# Altium PCB SolderingStation_v2.7_2026-06-25.pcbdoc
Units mil, origin at the board's own origin, x right, y up, seen from the top; angles counter-clockwise.
Board outline 3327.5 x 2330 mil, 2 copper layers (Top Layer, Bottom Layer); 49 components, 35 nets, 147 pads, 83 vias.
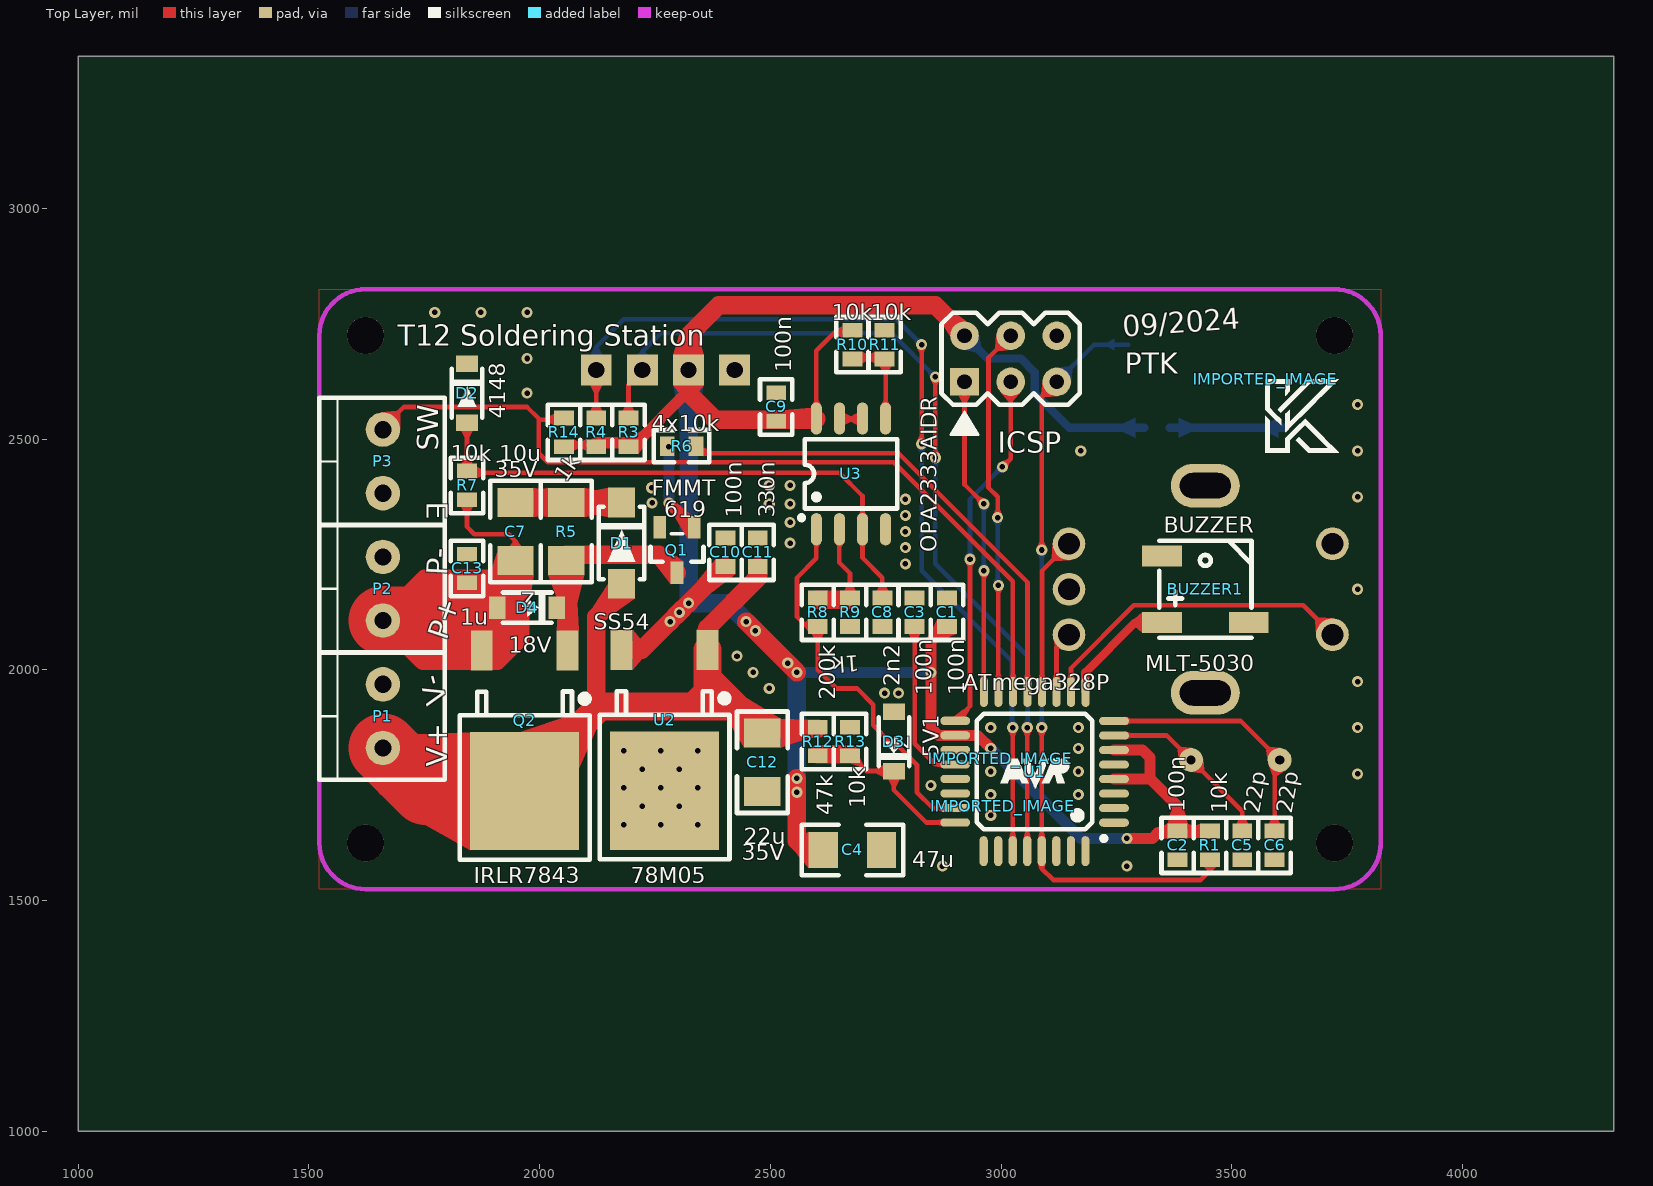
[diagram p0: Top Layer view]
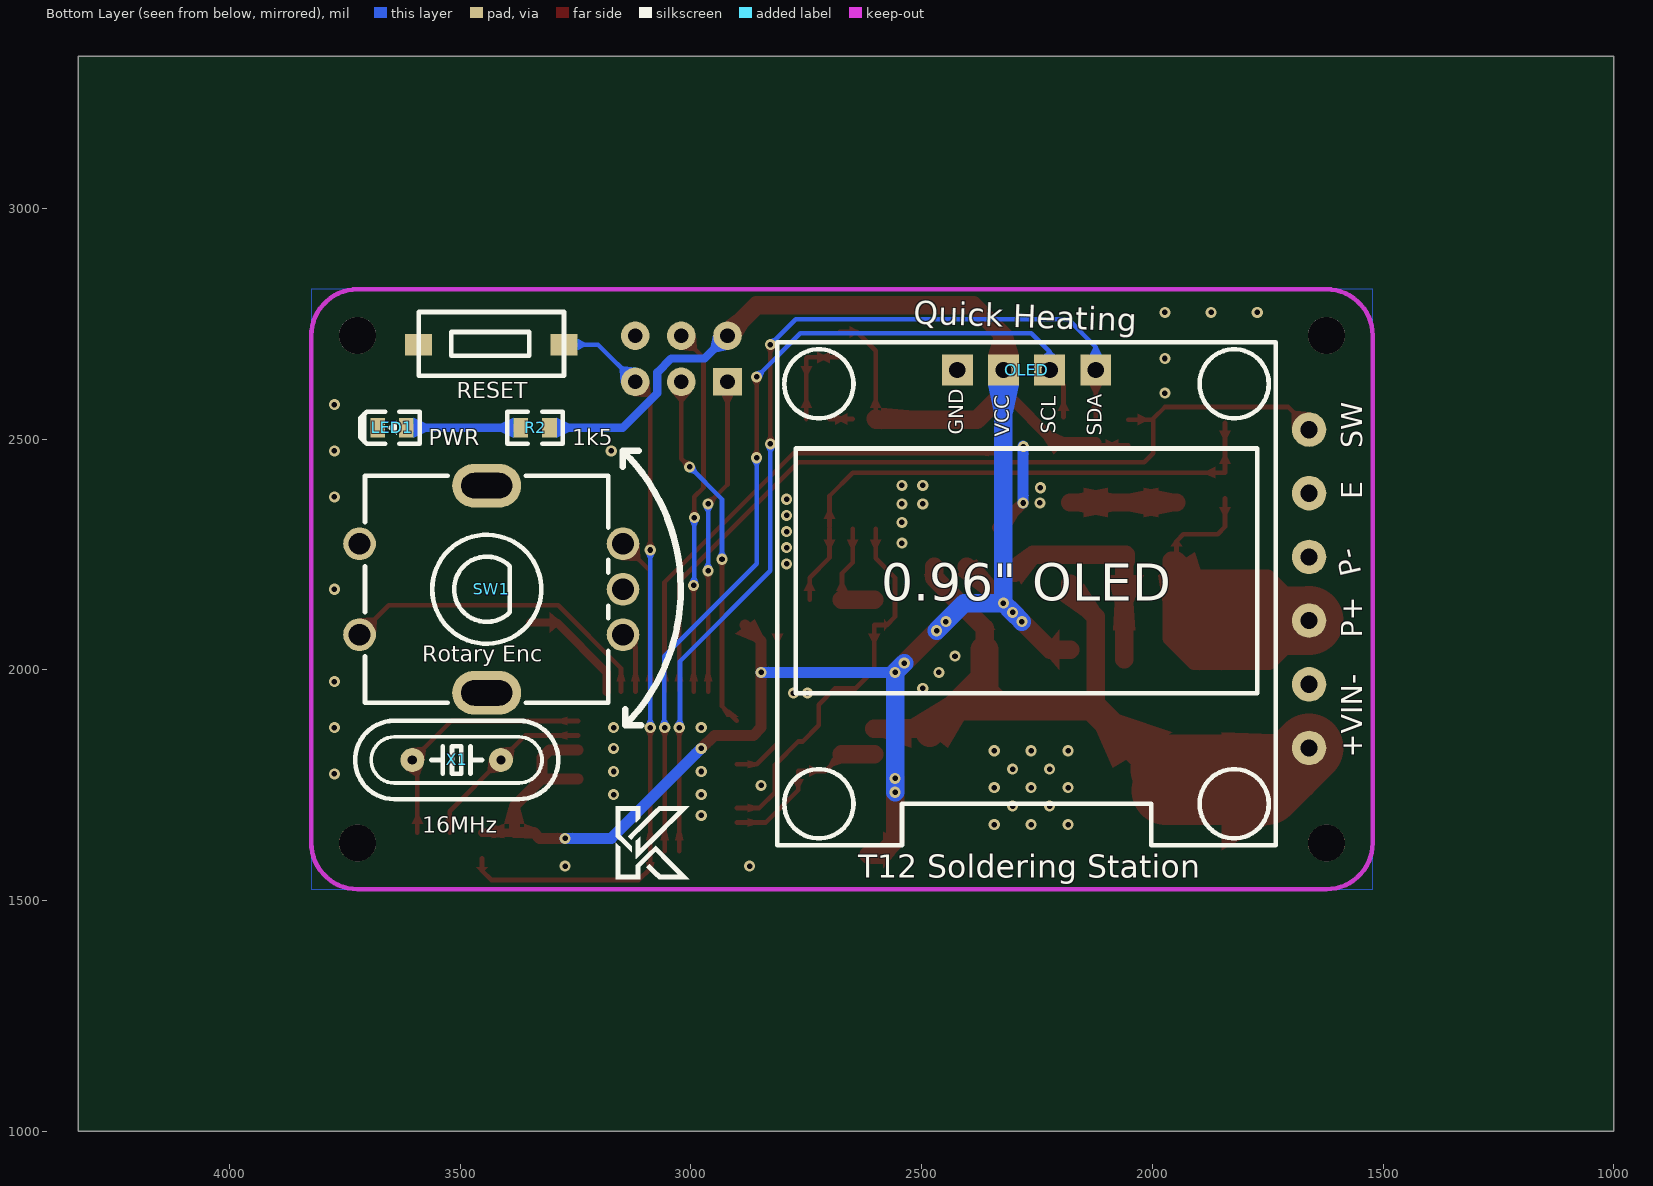
[diagram p1: Bottom Layer view, seen from below]

## Layer stack, top to bottom
Top Layer: signal copper (thickness not stored)
Dielectric: dielectric 12.6, FR-4, Dk 4.8
Bottom Layer: signal copper (thickness not stored)

## Board outline
4327.5,1000 1000,1000 1000,3330 4327.5,3330

## Components (designator, comment, footprint, x,y, rotation, side; value= is the part's Value field where it differs from the comment)
BUZZER1 "MLT-5030" MLT-5030 3442.5,2175 r270 top
C1 "100n" 0603#1 2882.5,2125 r90 top
C2 "100n" 0603#1 3382.5,1620 r270 top
C3 "100n" 0603#1 2812.5,2125 r90 top
C4 "47u" 1206 2677.5,1610 r0 top
C5 "22p" 0603#1 3522.5,1620 r270 top
C6 "22p" 0603#1 3592.5,1620 r270 top
C7 "10u" 1206 1947.5,2300 r270 top
C8 "2n2" 0603#1 2742.5,2125 r270 top
C9 "100n" 0603#1 2512.5,2570 r90 top
C10 "100n" 0603#1 2402.5,2255 r90 top
C11 "330n" 0603#1 2472.5,2255 r90 top
C12 "22u" 1206 2482.5,1800 r270 top
C13 "1u" 0603#1 1842.5,2220 r90 top
D1 "SS54" DIODE-SMA(DO-214AC) 2177.5,2275 r90 top
D2 "1N4148W" DIODE-SOD-123 1842.5,2600 r270 top
D3 "5V1" ZENER-SOD-123 2767.5,1845 r90 top
D4 "18V" ZENER-SOD-123 1972.5,2135 r180 top
ICSP "ICSP-6" ICSP-6 2920.6,2624.4 r0 top
IMPORTED_IMAGE "IMPORTED_IMAGE" IMPORTED_IMAGE 3003.6,1705.1 r0 top
IMPORTED_IMAGE "IMPORTED_IMAGE" IMPORTED_IMAGE 2997.99,1807.64 r0 top
IMPORTED_IMAGE "IMPORTED_IMAGE" IMPORTED_IMAGE 3572.4,2630.1 r0 top
LED1 "PWR" LED0603 3647.5,2525 r180 bottom
OLED "OLED" "I2C - OLED 0.96\" 128X64" 2272.5,2650 r0 bottom
P1 "KF350-3.5mm" KF350-2P 1522.5,1900 r90 top
P2 "KF350-3.5mm" KF350-2P 1522.5,2176 r90 top
P3 "KF350-3.5mm" KF350-2P 1522.5,2452 r90 top
Q1 "FMMT619" SOT-23-3_L2.9-W1.6-P1.90-LS2.8-BR 2297.5,2260 r90 top
Q2 "IRLR7843TRPBF" TO-252-2 1967.5,1890 r180 top
R1 "10k" 0603#1 3452.5,1620 r90 top
R2 "1k5" 0603#2 3337.5,2525 r180 bottom
R3 "10k" 0603#1 2192.5,2515 r270 top
R4 "10k" 0603#1 2122.5,2515 r90 top
R5 "1k" 1206 2057.5,2300 r270 top
R6 "10k" 0603#1 2307.5,2485 r180 top
R7 "10k" 0603#1 1842.5,2400 r90 top
R8 "200k" 0603#1 2602.5,2125 r90 top
R9 "1k" 0603#1 2672.5,2125 r90 top
R10 "10k" 0603#1 2677.5,2705 r90 top
R11 "10k" 0603#1 2747.5,2705 r270 top
R12 "47k" 0603#1 2602.5,1845 r90 top
R13 "10k" 0603#1 2672.5,1845 r270 top
R14 "10k" 0603#1 2052.5,2515 r90 top
RESET "3x6x2.5" KEY-3.0*6.0 3432.5,2705 r180 bottom
SW1 "Rotary Enc" BOURNS_PEC11R-4XXXF-SXXXX 3432.5,2175 r270 bottom
U1 "ATMEGA328P-AU" TQFP-32_7X7X08P 3072.5,1780 r180 top
U2 "78M05" TO-252-2 2270.5,1891 r180 top
U3 "LMV358IDR" SOP-8_150MIL 2674.5,2425 r90 top
X1 "16MHZ" HC-49S 3507.5,1805 r0 bottom

## Footprints (in the part's own frame and the unit in brackets; to place one, negate y for a bottom-side part, rotate by r counter-clockwise, add the part's x,y. Pads: shape width x height; smd on the part's side, far side on the other; paste and mask are expansions set on the pad)
0603#1 [mil]
  rect 32x43 smd paste+0 mask+2: 1(-31,0) 2(31,0)
  silkscreen extent -60,-35 60,35
0603#2 [mil]
  rect 32x43 smd paste+0 mask+2: 1(31,0) 2(-31,0)
  silkscreen extent -60,-35 60,35
1206 [mil]
  rect 63x78.74 smd paste+0 mask+2: 1(-62.99,0) 2(62.99,0)
  silkscreen extent -110,-55 110,55
BOURNS_PEC11R-4XXXF-SXXXX [mm]
  round 1.8 hole 1.2 paste+0 mask+0.102: 1(2.5,-7.25) 2(-2.5,-7.25) A(2.5,7.25) B(-2.5,7.25) C(0,7.25)
  oval 2.4x3.8 hole 1.4 slot 2.8 at 90 deg paste+0 mask+0.102: MT1(5.7,-0.25) MT2(-5.7,-0.25)
  silkscreen extent -6.25,-6.95 6.25,6.45
DIODE-SMA(DO-214AC) [mil]
  rect 64x58 smd paste+0 mask+2: 1(-88,0) 2(88,0)
  silkscreen extent -78,-49 79,49
DIODE-SOD-123 [mil]
  rect 35.8x48 smd paste+0 mask+2: 1(64,0) 2(-64,0)
  silkscreen extent -53,-33 53,33
HC-49S [mil]
  round 52 hole 20 paste+0 mask+4: 1(96,0) 2(-96,0)
  silkscreen extent -220,-85 220,85
"I2C - OLED 0.96\" 128X64" [mm]
  rect 1.7x1.7 hole 0.9 paste+0 mask+0.102: 1(3.81,0) 2(1.27,0) 3(-1.27,0) 4(-3.81,0)
  silkscreen extent -13.72,-1.52 13.72,26.16
ICSP-6 [mil]
  rect 62x60 hole 32 paste+0 mask+4: 1(0,0)
  round 62 hole 32 paste+0 mask+4: 2(0,100) 3(100,0) 4(100,100) 5(200,0) 6(200,100)
  silkscreen extent -50,-115 250,150
IMPORTED_IMAGE [mil]
KEY-3.0*6.0 [mil]
  rect 59.05x47.24 smd paste+0 mask+4: 1(157.5,0) 2(-157.5,0)
  silkscreen extent -157,-67 158,71
KF350-2P [mm]
  round 1.9 hole 0.95 paste+0 mask+0.102: 1(-1.75,-3.5) 2(1.75,-3.5)
  silkscreen extent -3.5,-6.9 3.5,0
LED0603 [mil]
  rect 32x43 smd paste+0 mask+2: 1(31,0) 2(-31,0)
  silkscreen extent -69,-35 60,35
MLT-5030 [mil]
  rect 46x86 smd paste+0 mask+2: 1(72,-94) 2(72,94) 3(-72,-94)
  silkscreen extent -105,-100 105,100
SOP-8_150MIL [mil]
  oval 70x24 smd paste+0 mask+2: 1(-120,75) 2(-120,25) 3(-120,-25) 4(-120,-75) 5(120,-75) 6(120,-25) 7(120,25) 8(120,75)
  silkscreen extent -75,-100 75,100
SOT-23-3_L2.9-W1.6-P1.90-LS2.8-BR [mm]
  rect 1.25x0.7 smd paste+0 mask+0.102: 1(1.25,-0.95) 2(1.25,0.95) 3(-1.25,0)
  silkscreen extent -0.65,-1.46 0.9,1.46
TO-252-2 [mm]
  rect 1.2x2.2 smd paste+0 mask+0.102: 1(-2.362,-3.876) 3(2.362,-3.871)
  rect 6x6.5 smd paste+0 mask+0.102: 4(0,3.876)
  silkscreen extent -3.57,-1.61 3.57,7.64
TQFP-32_7X7X08P [mm]
  oval 1.65x0.45 smd paste+0 mask+0.051: 1(-4.369,2.817) 2(-4.369,2.017) 3(-4.369,1.217) 4(-4.369,0.417) 5(-4.369,-0.381) 6(-4.369,-1.181) 7(-4.369,-1.981) 8(-4.369,-2.781) 17(4.369,-2.791) 18(4.369,-1.991) 19(4.369,-1.191) 20(4.369,-0.391) 21(4.369,0.406) 22(4.369,1.207) 23(4.369,2.007) 24(4.369,2.807)
  oval 0.45x1.65 smd paste+0 mask+0.051: 9(-2.804,-4.381) 10(-2.004,-4.381) 11(-1.204,-4.381) 12(-0.404,-4.381) 13(0.394,-4.381) 14(1.194,-4.381) 15(1.994,-4.381) 16(2.794,-4.381) 25(2.804,4.381) 26(2.004,4.381) 27(1.204,4.381) 28(0.404,4.381) 29(-0.394,4.381) 30(-1.194,4.381) 31(-1.994,4.381) 32(-2.794,4.381)
  silkscreen extent -3.18,-3.18 3.18,3.18
ZENER-SOD-123 [mil]
  rect 35.8x48 smd paste+0 mask+2: 1(64,0) 2(-64,0)
  silkscreen extent -53,-33 53,33

## Free pads (board coordinates)
  round 80 hole 80 unplated paste+0: ""(1622.5,1625) ""(1622.5,2725) ""(3722.5,1625) ""(3722.5,2725)

## Via types
v1: diameter 24, hole 12, Top Layer to Bottom Layer, tented both sides, 83 vias

## Nets (pads, with @x,y where several pads share a name; then routed paths per layer and width w, separated by ;. In a path a pad name is that pad's centre, name@x,y a point inside that pad or via, vN(x,y) a via of type N, cw(c..) or ccw(c..) an arc to the next point about the centre after c; other vN are vias at no path point)
24V: C11.1 C12.1 D1.1 P1.1 Q2.4 R12.2 U2.1 | length 2219
  Top Layer w40: 2122.5,1921 2122.5,2115 2177.5,2170 D1.1 ; U2.1 2363.5,2091 2472.5,2200 C11.1 ; C12.1 2492.1,1872.6 R12.2@2602.5,1872.6
  Top Layer w60: Q2.4@1970.5,1738.6 1948.1,1738.6 2130.5,1921 2333.5,1921 2363.5,1951 U2.1 ; 2310.5,1921 2424.5,1921 ; 2363.5,1982.2 2363.5,1981.99 2424.49,1921 ; C12.1 2424.5,1921
  Top Layer w150: Q2.4@1970.5,1738.6 1752.8,1738.6 P1.1 1706.4,1785 Q2.4@1972.5,1785
ADC0: R8.1 U1.23 U3.1 | length 841.4
  Top Layer w10: U3.1@2599.5,2306 2599.5,2242 2557.5,2200 2557.5,2115 2575.1,2097.4 2602.5,2097.4 2602.5,2000 2642.5,1960 2687.5,1960 2722.5,1925 2722.5,1880 2757.5,1845 2767.5,1845 2817.5,1795 2817.5,1735 2851.5,1701 U1.23
ADC1: D3.2 R12.1 R13.2 U1.24 | length 383.3
  Top Layer w10: R13.2@2672.5,1817.4 2708.9,1781 D3.2 2767.5,1740 2838,1669.5 U1.24
  Top Layer w40: R12.1@2602.5,1817.4 R13.2@2672.5,1817.4
AREF: C3.1 U1.20 | length 363.9
  Top Layer w10: C3.1@2812.5,2097.4 2812.5,1840 2857.1,1795.4 U1.20
D2_1: C8.1 D2.1 R7.2 U3.3 | length 1224.6
  Top Layer w10: D2.1 1842.5,2427.5 2649,2427.5 2699.5,2377 U3.3@2699.5,2310 ; U3.3@2699.5,2306 2699.5,2243 2742.5,2200 C8.1@2742.5,2152.6
D5: BUZZER1.1 U1.9 | length 253.4
  Top Layer w18: U1.9 3182.5,1952.9 3182.5,1995 3290.5,2103 BUZZER1.1
D6: SW1.1 U1.10 | length 700.5
  Top Layer w10: U1.10 3151.4,2003.9 3287.5,2140 3654.5,2140 SW1.1
D7: SW1.A U1.11 | length 135.4
  Top Layer w10: U1.11 3119.9,2049.4 SW1.A
D8: SW1.B U1.12 | length 345.2
  Top Layer w10: U1.12 3088.4,2214.8 SW1.B
D9: R6.1 U1.13 | length 1090.7
  Top Layer w10: R6.1@2335.1,2485 2335.1,2470 2777.5,2470 3057,2190.5 U1.13
D10: P3.2 R14.2 U1.14 | length 1874.9
  Top Layer w10: P3.2@1660.3,2524.9 1705.4,2570 1972.5,2570 1997.5,2545 1997.5,2470 2017.5,2450 2767.5,2450 3025.5,2192 U1.14@3025.5,1956.5 ; 1997.5,2542.6 R14.2@2052.5,2542.6
GND: BUZZER1.2 C1.2 C2.2 C3.2 C4.2 C5.2 C6.2 C8.2 C9.2 C10.2 C11.2 C12.2 C13.2 D2.2 D3.1 ICSP.6 LED1.2 OLED.1 P1.2 P2.2 P3.1 Q1.2 R9.1 R11.1 R13.1 RESET.2 SW1.2 SW1.C U1.3 U1.5 U1.21 U2.4 U3.4
  other v1: 2872.5,1575 3272.5,1575 2182.5,1665 2262.5,1665 2342.5,1665 2977.5,1685 2222.5,1705 2302.5,1705 2977.5,1730 3167.5,1730 2182.5,1745 2262.5,1745 2342.5,1745 2847.5,1750 3772.5,1775 2977.5,1780 3167.5,1780 2222.5,1785 2302.5,1785 2182.5,1825 2262.5,1825 2342.5,1825 3167.5,1830 2977.5,1875 3167.5,1875 3772.5,1875 2747.5,1950 2777.5,1950 2497.5,1960 3772.5,1975 2462.5,1995 2427.5,2030 3772.5,2175 2792.5,2230 2792.5,2265 2542.5,2275 2792.5,2300 2542.5,2320 2792.5,2335 2497.5,2360 2542.5,2360 2243.5,2362 2792.5,2370 3772.5,2375 2242.5,2395 2497.5,2400 2542.5,2400 3172.5,2475 3772.5,2475 3772.5,2575 1972.5,2600 1972.5,2675 1772.5,2775 1872.5,2775 1972.5,2775
MISO: ICSP.1 U1.16 | length 689.3
  Top Layer w10: ICSP.1 2920.6,2401.9 v1(2962.5,2360) ; U1.16 v1(2962.5,2215)
  Bottom Layer w10: v1(2962.5,2215) v1(2962.5,2360)
MOSI: ICSP.4 U1.15 | length 800.7
  Top Layer w10: v1(2992.5,2330) 2992.5,2375 2972.5,2395 2972.5,2676.26 ICSP.4 ; U1.15 v1(2994,2183.5)
  Bottom Layer w10: v1(2992.5,2330) 2992.5,2185 v1(2994,2183.5)
P+: C7.2 C13.1 D4.1 P2.1 Q2.3 R7.1 | length 1331.6
  Top Layer w10: R7.1@1842.5,2372.4 1842.5,2310 1858.5,2294 1932.5,2294 1947.5,2279 C7.2
  Top Layer w40: Q2.3@1880,2023.2 1880,2020 1747.4,2020 P2.1 1750.6,2197.4 1842.5,2197.4 1907.9,2197.4 C7.2 1957.5,2237 1957.5,2070 1907.5,2020 1889,2020 Q2.3@1889,2021
  Top Layer w150: P2.1 1902.5,2105
R2_2: LED1.1 R2.2 | length 248.9
  Bottom Layer w18: R2.2@3365.1,2525 LED1.1@3614,2525
R5_1: C7.1 D1.2 R5.1 | length 230
  Top Layer w40: C7.1 R5.1 D1.2
R5_2: D4.2 Q1.3 Q2.1 R5.2 | length 484.3
  Top Layer w40: Q2.1@2061,2023.4 2061,2233.5 R5.2 2057.5,2250 2258.3,2250 Q1.3
R6_2: Q1.1 R6.2 | length 199.9
  Top Layer w24: v1(2280,2361.9) 2332.7,2309.2 Q1.1
  Bottom Layer w24: v1@2279.95,2485 v1(2280,2361.9) v1(2280,2361.9)
  other v1: 2279.5,2484
R8_2: R8.2 R9.2 U3.2 | length 233
  Top Layer w10: U3.2@2649.5,2306 2649.5,2233 2672.5,2210 R9.2@2672.5,2152.5
  Top Layer w40: R8.2@2602.5,2152.5 R9.2@2672.5,2152.5
R11_2: R10.1 R11.2 U3.5 | length 204.2
  Top Layer w10: R10.1@2677.5,2677.4 2747.5,2677.4 2749.5,2675.4 U3.5@2749.5,2544
RESET: ICSP.5 R1.1 RESET.1 U1.29 | length 1666.5
  Top Layer w10: v1(3088,1875) U1.29 3088,1569.5 3112.5,1545 3432.5,1545 3452.5,1565 R1.1@3452.5,1592.4 ; v1(3088,2260) 3088,2591.76 ICSP.5
  Bottom Layer w10: v1(3088,1875) v1(3088,2260) ; ICSP.5 3201.2,2705 RESET.1
S$22: 
S$32: 
S$61: 
S$62: 
S$63: 
S$2711: 
SCK: ICSP.3 U1.17 | length 784.2
  Top Layer w10: U1.17 2932.5,1921.9 v1(2932.5,2240) ; v1(3002.5,2440) 3020.61,2458.11 ICSP.3
  Bottom Layer w10: v1(2932.5,2240) 2932.5,2370 v1(3002.5,2440)
SCL: OLED.3 R3.1 U1.28 | length 1956.5
  Top Layer w10: R3.1@2192.5,2547.6 2192.5,2618 OLED.3@2222.5,2648 ; v1(2857.5,2460) v1(2857.5,2635) ; U1.28 v1(3056.6,1875)
  Bottom Layer w10: OLED.3@2222.5,2648 2222.5,2690 2262.5,2730 2762.5,2730 v1(2857.5,2635) ; v1(2857.5,2460) 2857.5,2230 3057.5,2030 3057.5,1875.9 v1(3056.6,1875)
SDA: OLED.4 R4.2 U1.27 | length 2084.1
  Top Layer w10: R4.2@2122.5,2547.6 OLED.4@2122.5,2648 ; v1(2827.5,2490) v1(2827.5,2705) ; U1.27 v1(3025.1,1875)
  Bottom Layer w10: OLED.4@2122.5,2648 2122.5,2700 2182.5,2760 2772.5,2760 v1(2827.5,2705) ; v1(2827.5,2490) 2827.5,2215 3023.5,2019 3023.5,1878.7 v1(3025.1,1875)
U3_6: U3.6 U3.7 | length 50
  Top Layer w10: U3.7@2649.5,2544 U3.6@2699.5,2544
VCC: C1.1 C2.1 C4.1 C9.1 C10.1 ICSP.2 OLED.2 R1.2 R2.1 R3.2 R4.1 R10.2 R14.1 U1.4 U1.6 U1.18 U2.3 U3.8 | length 5401.4
  Top Layer w10: R14.1@2052.5,2487.4 R4.1@2122.5,2487.4 ; U3.8@2599.5,2544 2599.5,2692 2602.5,2695 2640.1,2732.6 R10.2@2677.5,2732.6
  Top Layer w18: C2.1@3382.5,1647.6 R1.2@3452.5,1647.6
  Top Layer w24: R4.1@2122.5,2492.5 2122.5,2492.4 2192.5,2492.4 2209.9,2492.4 2317.5,2600 2322.5,2600 ; C1.1@2882.5,2097.4 2847.5,2062.4 v1(2847.5,1995) 2847.5,1875 2864.1,1858.4 U1.18 2949.1,1858.4 v1(2977.5,1830) ; U1.4 3323.9,1763.6 ; U1.6 3306,1826.5 3322.5,1810 3322.5,1765 3382.5,1705 3382.5,1647.6 3340.1,1647.6 3327.5,1635 v1(3272.5,1635)
  Top Layer w40: U2.3 2220.9,2043.4 v1(2282.5,2105) v1(2302.5,2125) v1(2322.5,2145) 2401.5,2224 C10.1 ; v1(2447.5,2105) v1(2537.5,2015) v1(2557.5,1995) ; v1(2557.5,1765) v1(2557.5,1735) 2557.5,1630 2587.5,1600 C4.1@2614.5,1600 ; U3.8@2599.5,2544 2597.9,2542.4 2512.5,2542.4 2380.1,2542.4 2322.5,2600 2322.5,2648 2322.5,2725 2387.5,2790 2857.5,2790 2920.6,2726.9 ICSP.2
  Bottom Layer w18: ICSP.2 2970,2675 3042.5,2675 3072.5,2645 3072.5,2600 3147.5,2525 R2.1@3309.9,2525
  Bottom Layer w24: v1(2557.5,1995) v1(2847.5,1995) ; v1(2977.5,1830) 3172.5,1635 v1(3272.5,1635)
  Bottom Layer w40: v1(2282.5,2105) v1(2302.5,2125) v1(2322.5,2145) ; OLED.2@2322.5,2648 v1(2322.5,2145) ; v1(2467.5,2085) v1(2447.5,2105) 2407.5,2145 v1(2322.5,2145) ; v1(2537.5,2015) v1(2557.5,1995) v1(2557.5,1765) v1(2557.5,1735)
XTAL1: C5.1 U1.7 X1.2 | length 392.3
  Top Layer w10: U1.7 3358.5,1858 X1.2 3522.5,1694 C5.1@3522.5,1647.6
XTAL2: C6.1 U1.8 X1.1 | length 556
  Top Layer w10: U1.8 3519,1889.5 X1.1 3592.5,1794 C6.1@3592.5,1647.6
pads on no net: BUZZER1.3 SW1.MT1 SW1.MT2 U1.1 U1.2 U1.19 U1.22 U1.25 U1.26 U1.30 U1.31 U1.32

## Polygon pours and split planes (outlines as drawn)
GND on Bottom Layer (solid): 1522.5,2825 3822.5,2825 3822.5,1525 1522.5,1525
GND on Top Layer (solid): 1522.5,2825 3822.5,2825 3822.5,1525 1522.5,1525

## Keep-outs
Keep-Out Layer:
  lines w10: 1522.5,1625 ccw(c1622.5,1625) 1622.5,1525 ; 1522.5,2725 cw(c1622.5,2725) 1622.5,2825 ; 3722.5,1525 ccw(c3722.5,1625) 3822.5,1625 ; 3722.5,2825 cw(c3722.5,2725) 3822.5,2725

## Other copper
Top Layer:
  region net XTAL1: 3268.12,1849.14 3268.12,1866.86 3283.12,1863 3283.12,1853
  region net XTAL2: 3268.12,1880.64 3268.12,1898.36 3283.12,1894.5 3283.12,1884.5
  region net D6: 3160.26,1976.12 3142.54,1976.12 3146.4,1991.12 3156.4,1991.12
  region net D7: 3128.76,1976.12 3111.04,1976.12 3114.9,1991.12 3124.9,1991.12
  region net D8: 3097.26,1976.12 3079.54,1976.12 3083.4,1991.12 3093.4,1991.12
  region net D9: 3065.86,1976.12 3048.14,1976.12 3052,1991.12 3062,1991.12
  region net D10: 3034.36,1976.12 3016.64,1976.12 3020.5,1991.12 3030.5,1991.12
  region net MOSI: 3002.86,1976.12 2985.14,1976.12 2989,1991.12 2999,1991.12
  region net MISO: 2971.36,1976.12 2953.64,1976.12 2957.5,1991.12 2967.5,1991.12
  region net SCK: 2896.86,1898.76 2921.86,1898.76 2931.43,1913.76 2917.29,1913.76
  region net AREF: 2876.88,1786.54 2876.88,1804.26 2861.88,1800.4 2861.88,1790.4
  region net ADC0: 2876.88,1692.14 2876.88,1709.86 2861.88,1706 2861.88,1696
  region net ADC1: 2876.88,1660.64 2876.88,1678.36 2861.88,1674.5 2861.88,1664.5
  region net SDA: 3033.96,1631.12 3016.24,1631.12 3020.1,1646.12 3030.1,1646.12
  region net SCL: 3065.46,1631.12 3047.74,1631.12 3051.6,1646.12 3061.6,1646.12
  region net RESET: 3096.86,1583.88 3079.14,1583.88 3083,1569.5 3093,1569.5
  region net RESET: 3096.86,1631.12 3079.14,1631.12 3083,1646.12 3093,1646.12
  region net ADC0: 2611.5,2282 2587.5,2282 2594.5,2267 2604.5,2267
  region net R8_2: 2661.5,2282 2637.5,2282 2644.5,2267 2654.5,2267
  region net D2_1: 2711.5,2328 2687.5,2328 2694.5,2343 2704.5,2343
  region net D2_1: 2711.5,2282 2687.5,2282 2694.5,2267 2704.5,2267
  region net VCC: 2611.5,2568 2587.5,2568 2594.5,2583 2604.5,2583
  region net VCC: 2587.5,2522 2587.5,2568 2527.5,2562.44 2527.5,2522.44
  region net U3_6: 2661.5,2556.5 2661.5,2531.5 2676.5,2539 2676.5,2549
  region net U3_6: 2687.5,2531.5 2687.5,2556.5 2672.5,2549 2672.5,2539
  region net R11_2: 2761.5,2568 2737.5,2568 2744.5,2583 2754.5,2583
  region net D5: 3305.5,2080.5 3305.5,2125.5 3290.5,2112 3290.5,2094
  region net MISO: 2933.11,2594.4 2908.11,2594.4 2915.61,2579.4 2925.61,2579.4
  region net 24V: 1849.39,1609.45 1849.39,1865.35 1706.4,1860 1706.4,1710
  region net 24V: 1956.72,1865.35 2085.61,1788.62 2123.02,1871.09 2069.83,1902.76
  region net 24V: 1849.39,1609.45 1849.39,1865.35 1752.76,1813.64 1752.76,1663.64
  region net R5_2: 2036.88,2085.91 2084.12,2085.91 2081.05,2145.91 2041.05,2145.91
  region net P+: 1850.88,1999.09 1850.88,2070 1790.88,2040 1790.88,2000
  region net P+: 1898.12,2070 1898.12,1999.09 1907.5,2000 1907.5,2040
  region net 24V: 2339.88,2086.91 2387.12,2086.91 2383.5,2091 2343.5,2091
  region net VCC: 2201.12,2086.71 2201.12,2000.09 2220.9,2023.4 2220.9,2063.4
  region net R5_1: 2148.5,2331 2148.5,2395 2088.5,2383 2088.5,2343
  region net 24V: 2206.5,2155 2148.5,2187.01 2115.76,2136.55 2152.21,2116.43
  region net P+: 1986.87,2205.51 1908.13,2254.68 1893.79,2211.58 1925.34,2186.57
  region net P+: 1986.87,2205.51 1908.13,2205.51 1937.5,2145.51 1977.5,2145.51
  region net P+: 1935,2268.51 1960,2268.51 1952.5,2279 1942.5,2279
  region net R5_1: 1986.87,2394.49 1986.87,2331.49 2046.87,2342.99 2046.87,2382.99
  region net VCC: 2583.01,1570.63 2583.01,1649.37 2571.64,1644.14 2557.5,1601.72
  region net 24V: 2443.13,1831.49 2521.87,1894.49 2448.06,1939.86 2403.28,1899.79
  region net 24V: 2521.87,1894.49 2521.87,1831.49 2581.87,1852.56 2581.87,1892.56
  region net R5_2: 2096.87,2205.51 2018.13,2205.51 2041.05,2145.51 2081.05,2145.51
  region net R5_1: 2096.87,2394.49 2096.87,2331.49 2156.87,2343 2156.87,2383
  region net R5_1: 2018.13,2331.49 2018.13,2394.49 1958.13,2382.99 1958.13,2342.99
  region net XTAL1: 3510,1667 3535,1667 3527.5,1682 3517.5,1682
  region net D2_1: 2730,2172 2755,2172 2747.5,2187 2737.5,2187
  region net VCC: 2424,2208 2381,2240 2342.83,2193.61 2375.26,2169.48
  region net AREF: 2825,2078 2800,2078 2807.5,2063 2817.5,2063
  region net 24V: 2494,2208 2451,2208 2452.5,2200 2492.5,2200
  region net XTAL2: 3580,1667 3605,1667 3597.5,1682 3587.5,1682
  region net VCC: 3404,1667 3404,1635 3431,1638.56 3431,1656.56
  region net VCC: 3361,1667 3404,1667 3394.5,1703 3370.5,1703
  region net VCC: 3361,1635 3361,1667 3340.06,1659.56 3340.06,1635.56
  region net VCC: 2904,2078 2861,2110 2845.09,2076.96 2864.55,2062.48
  region net R8_2: 2660,2172 2685,2172 2677.5,2187 2667.5,2187
  region net ADC0: 2581,2084.9 2581,2109.9 2575.1,2102.4 2575.1,2092.4
  region net ADC0: 2615,2078 2590,2078 2597.5,2063 2607.5,2063
  region net D10: 2031,2530.06 2031,2555.06 2016,2547.56 2016,2537.56
  region net VCC: 2074,2499.94 2074,2474.94 2089,2482.44 2089,2492.44
  region net SDA: 2110,2562 2135,2562 2127.5,2577 2117.5,2577
  region net VCC: 2101,2474.94 2101,2499.94 2086,2492.44 2086,2482.44
  region net VCC: 2181.03,2500 2214,2468 2233.61,2499.14 2216.38,2515.85
  region net SCL: 2180,2562 2205,2562 2197.5,2577 2187.5,2577
  region net ADC1: 2694,1810.03 2672.08,1798 2691.39,1791.48 2700.52,1796.5
  region net D2_1: 1864,2440 1864,2415 1879,2422.5 1879,2432.5
  region net D2_1: 1830,2447 1855,2447 1847.5,2462 1837.5,2462
  region net P+: 1855,2353 1830,2353 1837.5,2338 1847.5,2338
  region net R11_2: 2762,2658 2737,2658 2744.5,2643 2754.5,2643
  region net R11_2: 2726,2664.94 2726,2689.94 2711,2682.44 2711,2672.44
  region net VCC: 2656,2720.06 2656,2745.06 2641,2737.56 2641,2727.56
  region net R11_2: 2699,2689.94 2699,2664.94 2714,2672.44 2714,2682.44
  region net VCC: 3431,1635 3431,1667 3404,1656.56 3404,1638.56
  region net RESET: 3465,1573 3440,1573 3447.5,1565 3457.5,1565
  region net D9: 2354.5,2482.5 2354.5,2463.5 2369.5,2465 2369.5,2475
  region net ADC1: 2743.5,1768.5 2743.5,1793.5 2728.5,1786 2728.5,1776
  region net ADC1: 2780,1763.1 2755,1763.1 2762.5,1748.1 2772.5,1748.1
  region net D2_1: 1855,2518.1 1830,2518.1 1837.5,2503.1 1847.5,2503.1
  region net R6_2: 2321.12,2284.59 2328.94,2333.81 2296.96,2361.91 2292.3,2332.63
  region net R5_2: 2283.72,2186.19 2311.28,2235.41 2272.44,2264.14 2248.15,2231.87
  region net SDA: 2110,2616.54 2135,2616.54 2127.5,2601.54 2117.5,2601.54
  region net VCC: 2355.96,2683.46 2289.03,2683.46 2302.5,2725 2342.5,2725
  region net VCC: 2289.03,2616.54 2355.96,2616.54 2342.5,2600 2302.5,2600
  region net VCC: 3280.44,1626 3280.44,1644 3288.84,1647 3288.84,1623
  region net RESET: 3079,2267.94 3097,2267.94 3093,2276.34 3083,2276.34
  region net SCL: 2848.5,2467.94 2866.5,2467.94 2862.5,2476.34 2852.5,2476.34
  region net SDA: 2818.5,2497.94 2836.5,2497.94 2832.5,2506.34 2822.5,2506.34
  region net SCL: 2848.5,2627.06 2866.5,2627.06 2862.5,2618.66 2852.5,2618.66
  region net SDA: 2818.5,2697.06 2836.5,2697.06 2832.5,2688.66 2822.5,2688.66
  region net VCC: 2978.25,1841.98 2965.52,1829.25 2957.46,1833.07 2974.43,1850.04
  region net RESET: 3079,1867.06 3097,1867.06 3093,1858.66 3083,1858.66
  region net SCL: 3047.6,1867.06 3065.6,1867.06 3061.6,1858.66 3051.6,1858.66
  region net SDA: 3016.1,1867.06 3034.1,1867.06 3030.1,1858.66 3020.1,1858.66
  region net VCC: 2838.5,2002.94 2856.5,2002.94 2859.5,2011.34 2835.5,2011.34
  region net VCC: 2838.5,1987.06 2856.5,1987.06 2859.5,1978.66 2835.5,1978.66
  region net SCK: 3014.48,2439.25 3001.75,2451.98 3010.52,2455.09 3017.59,2448.02
  region net MOSI: 2983.5,2337.94 3001.5,2337.94 2997.5,2346.34 2987.5,2346.34
  region net MISO: 2963.25,2371.98 2950.52,2359.25 2947.41,2368.02 2954.48,2375.09
  region net SCK: 2923.5,2232.06 2941.5,2232.06 2937.5,2223.66 2927.5,2223.66
  region net MISO: 2953.5,2207.06 2971.5,2207.06 2967.5,2198.66 2957.5,2198.66
  region net MOSI: 2985,2175.56 3003,2175.56 2999,2167.16 2989,2167.16
  region net R6_2: 2291.98,2362.65 2279.25,2349.92 2283.07,2341.86 2300.04,2358.83
  region net MOSI: 2989.66,2726.32 3022.56,2693.46 2994.31,2691 2987.24,2698.07
  region net VCC: 2923.84,2755.23 2889.61,2723.76 2877.3,2741.92 2906.77,2769.02
  region net RESET: 3089.66,2626.32 3122.56,2593.46 3094.31,2591 3087.24,2598.07
  region net SCK: 3043.86,2603.9 2997.36,2603.89 3015.61,2582.19 3025.61,2582.2
  region net D10: 1697.7,2520.64 1655.89,2558.04 1690.52,2562.19 1697.98,2555.51
  region net P+: 1657.96,2144.43 1697.63,2104.76 1710.45,2128.96 1682.16,2157.25
  region net P+: 1657.96,2069.77 1697.63,2109.44 1710.45,2085.24 1682.16,2056.95
  region net XTAL2: 3616.69,1782.59 3579.62,1794.71 3587.5,1772.99 3597.5,1769.72
  region net XTAL2: 3577.55,1803.37 3605.13,1830.95 3582.01,1833.57 3574.94,1826.49
  region net XTAL1: 3385.55,1803.37 3413.13,1830.95 3390.01,1833.57 3382.93,1826.49
  region net XTAL1: 3409.87,1779.05 3437.45,1806.63 3440.06,1783.51 3432.99,1776.43
  region net D8: 3111.71,2275.65 3149.29,2238.07 3116.49,2235.78 3109.42,2242.86
  region net D7: 3111.71,2078.8 3149.29,2041.22 3123.44,2045.87 3116.37,2052.94
  region net D6: 3682.57,2074.36 3720.14,2111.94 3687.35,2114.22 3680.28,2107.15
  region net P+: 1821.5,2217 1977.5,2217 1977.5,2095 1822.5,2095
Bottom Layer:
  region net SDA: 2135,2683.46 2110,2683.46 2117.5,2698.46 2127.5,2698.46
  region net SCL: 2235,2683.46 2210,2683.46 2217.5,2690 2227.5,2690
  region net VCC: 2289.03,2616.54 2355.96,2616.54 2342.5,2556.54 2302.5,2556.54
  region net RESET: 3245.47,2717.5 3245.47,2692.5 3230.47,2700 3230.47,2710
  region net R2_2: 3600.5,2546.5 3600.5,2503.5 3573.5,2516 3573.5,2534
  region net R2_2: 3384.5,2503.5 3384.5,2546.5 3411.5,2534 3411.5,2516
  region net VCC: 3290.5,2546.5 3290.5,2503.5 3263.5,2516 3263.5,2534
  region net VCC: 3264.56,1626 3264.56,1644 3256.16,1647 3256.16,1623
  region net RESET: 3079,2252.06 3097,2252.06 3093,2243.66 3083,2243.66
  region net SCL: 2848.5,2452.06 2866.5,2452.06 2862.5,2443.66 2852.5,2443.66
  region net SDA: 2818.5,2482.06 2836.5,2482.06 2832.5,2473.66 2822.5,2473.66
  region net SCL: 2858.25,2646.98 2845.52,2634.25 2842.41,2643.02 2849.48,2650.09
  region net SDA: 2828.25,2716.98 2815.52,2704.25 2812.41,2713.02 2819.48,2720.09
  region net VCC: 2989.48,1830.75 2976.75,1818.02 2980.57,1809.96 2997.54,1826.93
  region net RESET: 3079,1882.94 3097,1882.94 3093,1891.34 3083,1891.34
  region net SCL: 3066.02,1882.43 3048.05,1883.42 3052.5,1891.59 3062.5,1891.04
  region net SDA: 3033.28,1883.78 3015.36,1882.02 3018.5,1890.77 3028.5,1891.75
  region net VCC: 2839.56,1986 2839.56,2004 2831.16,2007 2831.16,1983
  region net VCC: 2565.44,1986 2565.44,2004 2573.84,2007 2573.84,1983
  region net SCK: 3003.25,2428.02 2990.52,2440.75 2987.41,2431.98 2994.48,2424.91
  region net MOSI: 2983.5,2322.06 3001.5,2322.06 2997.5,2313.66 2987.5,2313.66
  region net MISO: 2953.5,2352.06 2971.5,2352.06 2967.5,2343.66 2957.5,2343.66
  region net SCK: 2923.5,2247.94 2941.5,2247.94 2937.5,2256.34 2927.5,2256.34
  region net MISO: 2953.5,2222.94 2971.5,2222.94 2967.5,2231.34 2957.5,2231.34
  region net MOSI: 3002.23,2192.23 2984.31,2190.58 2987.5,2199.31 2997.5,2200.23
  region net R6_2: 2288.72,2476.31 2270.72,2475.82 2267.95,2467.34 2291.95,2468
  region net R6_2: 2288.98,2369.86 2270.98,2369.81 2267.95,2378.2 2291.95,2378.27
  region net VCC: 2918.65,2693.46 2951.54,2726.33 2956.8,2700.91 2944.07,2688.18
  region net RESET: 3118.68,2655.34 3151.54,2622.44 3154,2650.69 3146.93,2657.76

## Silkscreen, mask and mechanical layers (free items; w line width, h text height)
Top Overlay:
  circle w10: c2567.5,2330 r5
  circle w10: c3222.5,1635 r5
  text "09/2024" at 3264.07,2722.55 h45 r4
  text "T12 Soldering Station" at 1692.5,2702.5 h45
  text "PTK" at 3267.5,2642.5 h45
  text "4148" at 1925,2545 h35 r90
  text "4x10k" at 2242.5,2517.5 h35
  text "SW" at 1780,2475 h45 r90
  text "35V" at 1902.5,2417.5 h35
  text "FMMT" at 2242.5,2377.5 h35
  text "E" at 1755,2365 h45 r270
  text "619" at 2269.5,2331.5 h35
  text "BUZZER" at 3352.5,2297.5 h35
  text "OPA2333AIDR" at 2860,2255 h35 r90
  text "P-" at 1799.97,2203.82 h45 r87
  text "SS54" at 2117.5,2087.5 h35
  text "P+" at 1798.77,2062.67 h45 r71
  text "ATmega328P" at 2917.5,1956.4 h35
  text "V-" at 1799.23,1930.82 h45 r105
  text "V+" at 1800,1790 h45 r90
  text "35V" at 2437.5,1587.5 h35
  text "IRLR7843" at 1857.5,1537.5 h35
Bottom Overlay:
  lines w14 net S$2711: 3107.5,1880 3142.5,1880.4 3142.5,1915 ; 3112.5,2475 3147.5,2475 ; 3142.27,1880.23 cw(c3442.5,2175) 3147.5,2475 ; 3147.5,2440 3147.5,2475
  text "Quick Heating" at 2518.37,2750.02 h50 r2
  text "SW" at 1545,2480 h45 r270
  text "E" at 1545,2370 h45 r270
  text "P-" at 1545.58,2210.06 h45 r257
  text "P+" at 1545,2070 h45 r270
  text "+VIN-" at 1545,1810 h45 r270
  text "16MHz" at 3582.5,1647.5 h35
  text "T12 Soldering Station" at 2637.5,1550 h50

## Text inside footprints (layer, text, board x,y; h text height)
D3: Top Overlay "Z" at 2768.5,1858 h32 r270
D4: Top Overlay "Z" at 1959.5,2136 h32
OLED: Bottom Overlay "0.96\" OLED" at 2587.5,2150 h80; Bottom Overlay "VCC" at 2309.55,2505.2 h31.5 r270; Bottom Overlay "GND" at 2409.55,2509.5 h31.5 r270; Bottom Overlay "SCL" at 2209.55,2512.4 h31.5 r270; Bottom Overlay "SDA" at 2109.55,2508.1 h31.5 r270